# Altium PCB PCB_STM32.PcbDoc (part 1 of 2)
Units mm, origin at the board's own origin, x right, y up, seen from the top; angles counter-clockwise.
Board outline 65.5 x 38.75 mm, 2 copper layers (Top Layer, Bottom Layer), stack 1.569 mm thick; 43 components, 32 nets, 212 pads, 42 vias.
Unrouted connection lines stored in the file: 9.
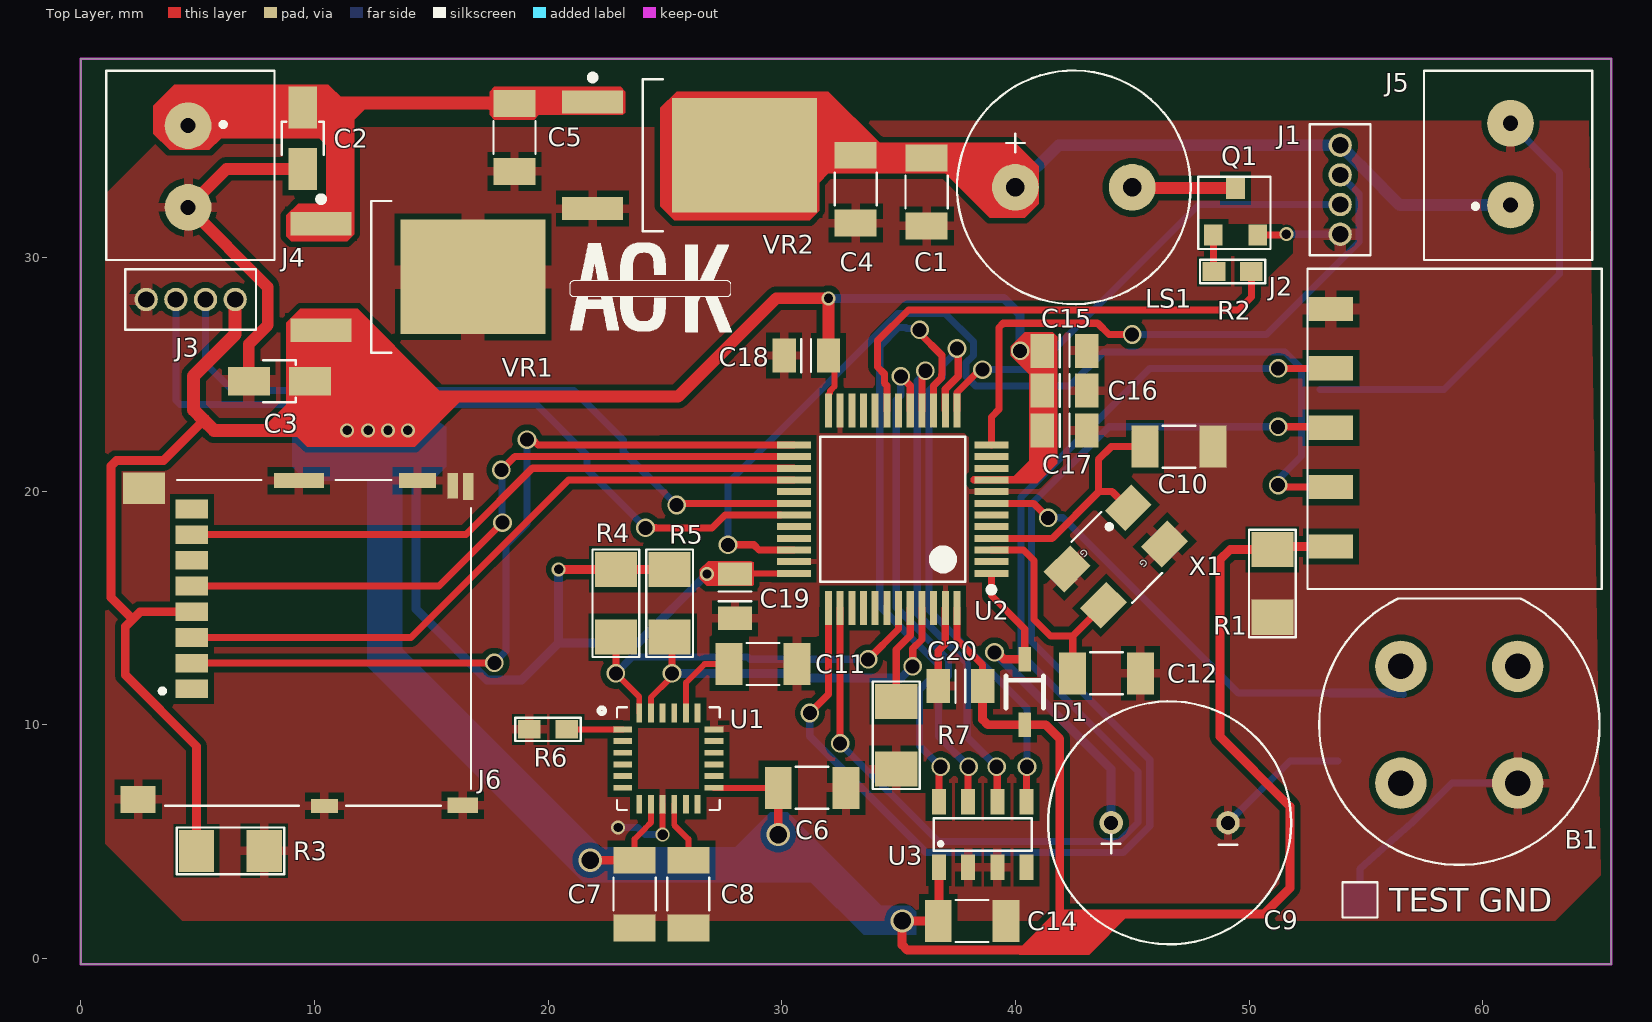
[diagram p0: Top Layer view]
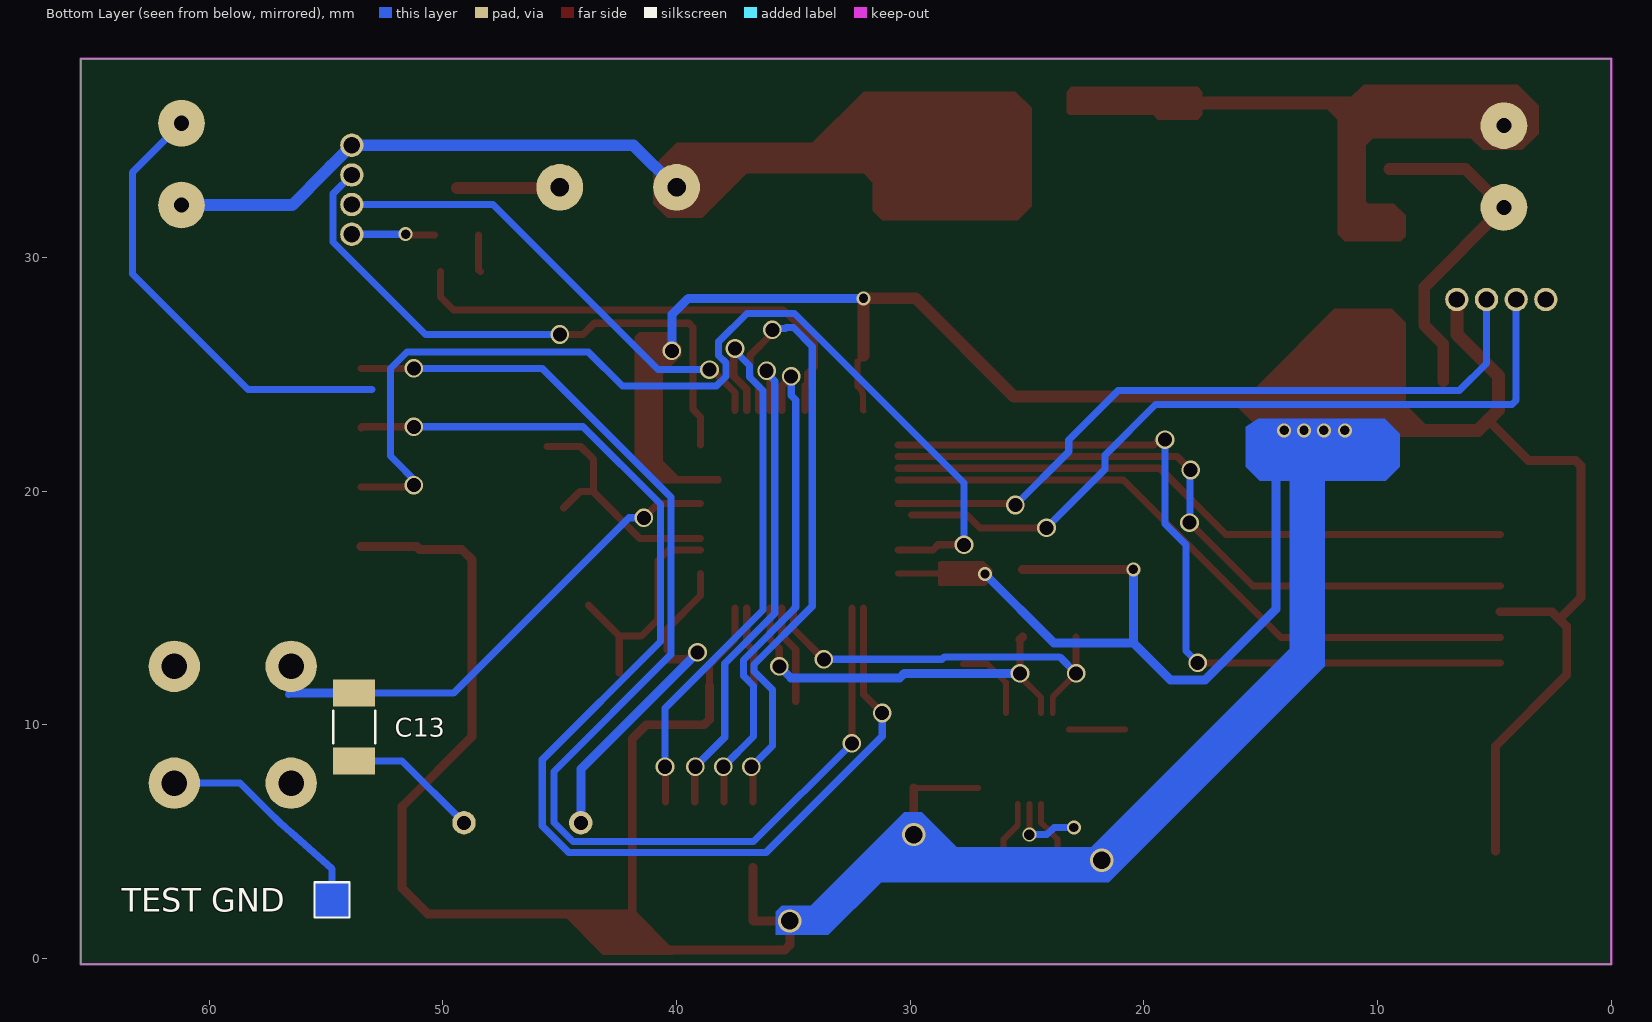
[diagram p1: Bottom Layer view, seen from below]
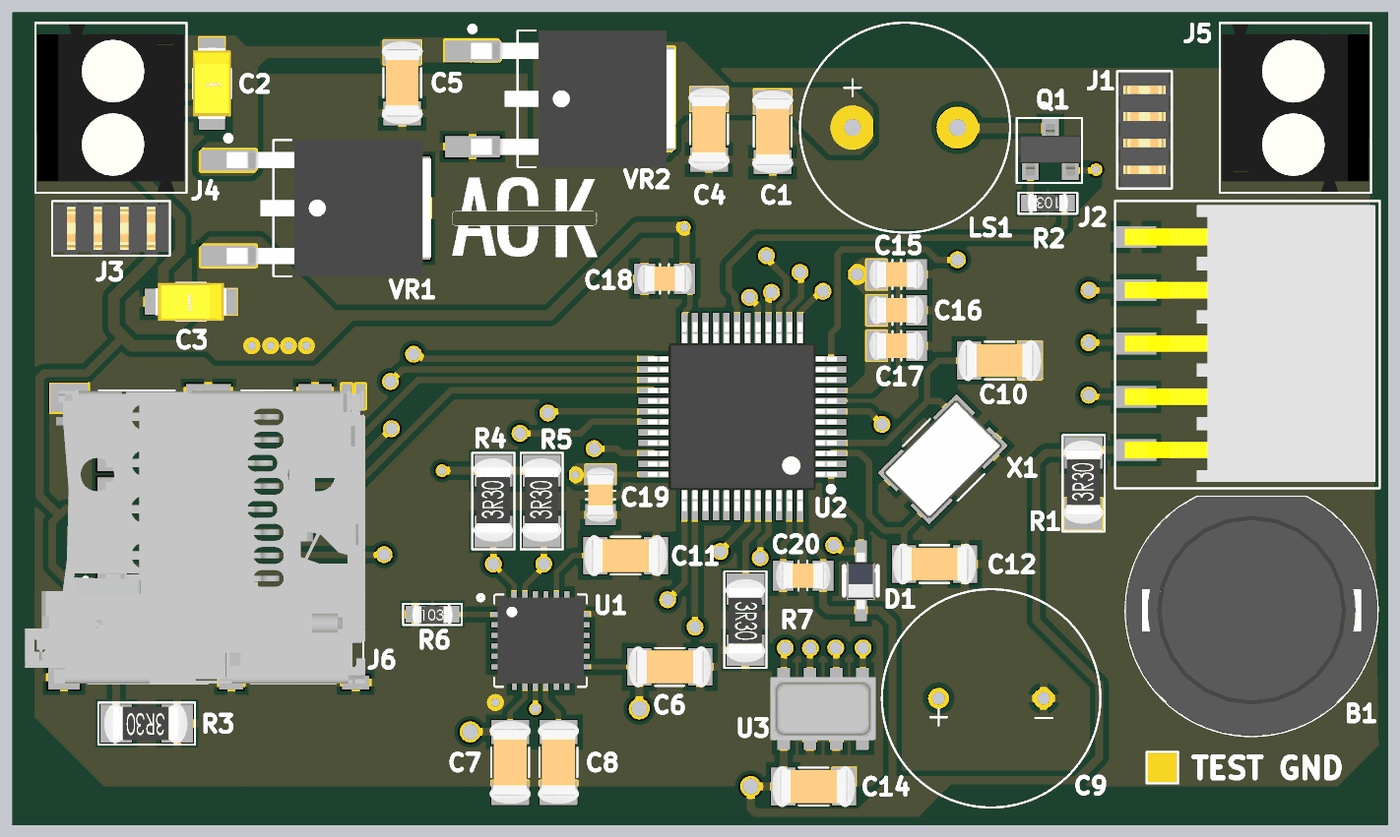
[diagram p2: 3D render of the assembled board from above, using the file's embedded part models]

## Layer stack, top to bottom
Top Solder: solder mask 0.0254, SM-001, Dk 4
Top Layer: signal copper 0.035
Dielectric 1: core 1.4986, Core-043, Dk 4.3
Bottom Layer: signal copper 0.035
Bottom Solder: solder mask 0.0254, SM-001, Dk 4

## Board outline
0,-0.25 65.5,-0.25 65.5,38.5 0,38.5

## Design rules (kind name [scope] priority, off if disabled: settings)
Clearance [All] p1: gap=0.152 ignorepadtopadclearanceinfootprint=FALSE except(0: Arc-Text Track-Text SMDPad-Text THPad-Text Via-Text Fill-Text Poly-Text Region-Text Text-Text; 0.254: THPad-THPad)
Creepage [All] p1: checkdistance=0.254 applytopolygonpour=TRUE
PlaneConnect [All] p1: planeconnectstyle=Relief reliefexpansion=0.508 reliefentries=4 reliefconductorwidth=0.381 reliefairgap=0.254
PolygonConnect [All] p1: connectstyle=Relief reliefconductorwidth=0.381 reliefentries=4 polygonreliefangle="90 Angle" airgapwidth=0.254
RoutingVias [All] p1: holewidth=0.6 width=0.8 viastyle="Through Hole" minholewidth=0.4 minwidth=0.5 maxholewidth=1 maxwidth=1.2
SMDEntry [All] p1: side=TRUE corner=TRUE anyangle=FALSE
SMDToCorner [All] p1: distance=60000
SMDToPlane [All] p1: distance=4724409
SolderMaskExpansion [All] p1: expansion=0.102 istentingtop=FALSE
UnRoutedNet [All] p1: checkbadconnections=TRUE
Width [All] p1: maxlimit=0.559 minlimit=0.203 preferedwidth=0.305
28 further rules are at their usual default settings.

## Classes and differential pairs
component class STM32: C1 C2 C3 C4 C5 J1 J2 J3 J4 J5 J6 LS1 Q1 R1 R2 R3 VR1 VR2
component class MCUs_STM32: B1 C6 C7 C8 C9 C10 C11 C12 C13 C14 C15 C16 C17 C18 C19 C20 D1 R4 R5 R6 R7 U1 U2 U3 X1

## Components (designator, comment, footprint, x,y, rotation, side; value= is the part's Value field where it differs from the comment)
B1 "B_D6R90 F1 LFS" PBUTTON_OFFMOM 59,10 r0 top
C1 "C1206C104K3RAC7800" CAP_1206 36.2,32.8 r90 top value=0.1uF
C2 "T494A106M020AT" CAP_1206_TANT 9.5,35.1 r270 top value=10uF
C3 "T494A106M020AT" CAP_1206_TANT 8.5,24.7 r180 top value=10uF
C4 "C1206C104K3RAC7800" CAP_1206 33.166,32.921 r270 top value=0.1uF
C5 "C1206C104K3RAC7800" CAP_1206 18.561,35.133 r270 top value=330nF
C6 "C1206C104K3RAC7800" CAP_1206 31.3,7.3 r180 top value=0.1uF
C7 "C1206C104K3RAC7800" CAP_1206 23.7,2.75 r90 top value=0.1uF
C8 "C1206C104K3RAC7800" CAP_1206 26,2.75 r270 top value=0.1uF
C9 "ESH477M050AH4AA" CAP_RADIAL_D10_P5 46.6,5.8 r0 top value=470uF
C10 "C1206C120J5GAC7800" CAP_1206 47,21.9 r0 top value=12pF
C11 "CC1206KRX7R9BB222" CAP_1206 29.2,12.6 r0 top value="2.2 nF"
C12 "C1206C120J5GAC7800" CAP_1206 43.9,12.2 r0 top value=12pF
C13 "C1206C104K3RAC7800" CAP_1206 53.8,9.9 r270 bottom value=0.1uF
C14 "C1206C104K3RAC7800" CAP_1206 38.15,1.6 r0 top value=0.1uF
C15 "CL21A475KAQNNNE" CAP_0805 42.1,26 r0 top value=4.7uF
C16 "CL21B105KBFNNNE" CAP_0805 42.1,24.3 r0 top value=1uF
C17 "CL21B104KBCNNNC" CAP_0805 42.1,22.6 r0 top
C18 "CL21B104KBCNNNC" CAP_0805 31.05,25.8 r180 top
C19 "CL21B104KBCNNNC" CAP_0805 28,15.5 r270 top
C20 "CL21B104KBCNNNC" CAP_0805 37.65,11.65 r180 top
D1 "1N4148WS" SOD_323_F 40.4,11.4 r270 top
J1 "RS1-04-G" PINHEADER_1X4_TH 53.9,32.895 r270 top
J2 "SMH-105-02-L-S" PINHEADER1X5_RA 53.5,22.71 r90 top
J3 "RS1-04-G" PINHEADER_1X4_TH 4.7,28.2 r180 top
J4 "0393570002" 2P_FEMALE_3.5MM_CONN 4.591,33.891 r270 top
J5 "0393570002" 2P_FEMALE_3.5MM_CONN 61.19,33.991 r90 top
J6 "2201778-1" MICRO_SD 9.5,13.5 r270 top
LS1 "CMI-9605-0580T" CMI-9605 42.5,33 r90 top
Q1 "MMBT3904-7-F" SOT_23_3 49.422,31.958 r0 top
R1 "RC1206FR-074K7L" RE_1206 51,16.05 r90 top value=4.7kR
R2 "RC0603JR-07100RL" RE_0603 49.3,29.4 r180 top value=100R
R3 "RC1206FR-074K7L" RE_1206 6.4,4.6 r180 top value=4.7kR
R4 "RC1206FR-074K7L" RE_1206 22.9,15.2 r90 top value=4.7kR
R5 "RC1206FR-074K7L" RE_1206 25.2,15.2 r90 top value=4.7kR
R6 "RC0603JR-070RL" RE_0603 20,9.8 r0 top value=0mR
R7 "RC1206FR-0710KL" RE_1206 34.9,9.55 r270 top value=10kR
U1 "MPU6050" QFN_24 25.15,8.55 r0 top
U2 "STM32F103C8T6" LQGP48-STM 34.75,19.225 r180 top
U3 "MS560702BA03-50" 8-SMD_MS560702BA03 38.6,5.3 r90 top
VR1 "LD1117V33" DPAK_TO-252-3 14.433,29.164 r0 top
VR2 "L7805CDT-TR" DPAK_TO-252-3 26.054,34.371 r0 top
X1 "ECS-80-10-30B-CKM-TR" "4-SMD, No Lead" 44.3,17.2 r225 top value="8 MHz" (schematic designator XTAL1)

## Footprints (in the part's own frame and the unit in brackets; to place one, negate y for a bottom-side part, rotate by r counter-clockwise, add the part's x,y. Pads: shape width x height; smd on the part's side, far side on the other; paste and mask are expansions set on the pad)
2P_FEMALE_3.5MM_CONN [mm]
  round 2 hole 0.65: 1(-1.75,0) 2(1.75,0)
  silkscreen extent -4.1,-3.5 4,3.7, body extent -4.05,-3.4 3.94,3.6, height 8.9
"4-SMD, No Lead" [mm]
  rect 1.6x1.25 smd mask+0.05: 1(-1.85,-1.1) 2(1.85,-1.1) 3(1.85,1.1) 4(-1.85,1.1)
  silkscreen extent -0.91,-1.79 0.9,1.9, body extent -2.5,-1.6 2.5,1.6, height 0.85
8-SMD_MS560702BA03 [mm] "TSQFP, 48-Leads, Body 7,00x7,00mm, Pitch 0,50mm, IPC Medium Density"
  rect 1.1x0.6 smd mask+0.05: 1(-1.4,1.875) 2(-1.4,0.625) 3(-1.4,-0.625) 4(-1.4,-1.875) 5(1.4,-1.875) 6(1.4,-0.625) 7(1.4,0.625) 8(1.4,1.875)
  silkscreen extent -0.7,-2.1 0.7,2.1, body extent -1.5,-2.5 1.5,2.5, height 0.98
CAP_0805 [mm]
  rect 1x1.45 smd mask+0.05: 1(-0.95,0) 2(0.95,0)
  silkscreen extent -0.2,-0.7 0.22,0.71, body extent -1.3,-0.68 1.3,0.68, height 0.9
CAP_1206 [mm]
  rect 1.15x1.8 smd mask+0.05: 1(-1.45,0) 2(1.45,0)
  silkscreen extent -0.7,-0.9 0.7,0.9, body extent -1.97,-0.98 1.97,0.98, height 1.3
CAP_1206_TANT [mm]
  rect 1.8x1.23 smd mask+0.05: 1(-1.31,0) 2(1.31,0)
  silkscreen extent -0.7,-0.9 0.7,0.9, body extent -1.7,-0.9 1.7,0.9, height 1.81
CAP_RADIAL_D10_P5 [mm]
  round 1 hole 0.6 mask+0.05: 1(-2.5,0) 2(2.5,0)
  silkscreen extent -5.2,-5.2 5.2,5.2, body extent -5.05,-5.03 4.95,4.97, height 20.2
CMI-9605 [mm]
  round 2 hole 0.8 mask+0.05: 1(0,2.5) 2(0,-2.5)
  silkscreen extent -5,-5 5,5, body extent -4.82,-4.81 4.78,6.2, height 5.16
DPAK_TO-252-3 [mm] "D-PAK, 3-Pads, Body 6,15x6,61mm (max), IPC Medium Density"
  rect 2.6x1 smd: 1(-4.15,2.28) 3(-4.15,-2.28)
  rect 6.2x4.9 smd: 2(2.35,0)
  silkscreen extent -4.27,-3.25 -1.15,3.45, body extent -4.22,-3.25 5.5,3.25, height 3.3
LQGP48-STM [mm] "TSQFP, 48-Leads, Body 7,00x7,00mm, Pitch 0,50mm, IPC Medium Density"
  rect 1.45x0.3 smd mask+0.055: 1(-4.225,2.75) 2(-4.225,2.25) 3(-4.225,1.75) 4(-4.225,1.25) 5(-4.225,0.75) 6(-4.225,0.25) 7(-4.225,-0.25) 8(-4.225,-0.75) 9(-4.225,-1.25) 10(-4.225,-1.75) 11(-4.225,-2.25) 12(-4.225,-2.75) 25(4.225,-2.75) 26(4.225,-2.25) 27(4.225,-1.75) 28(4.225,-1.25) 29(4.225,-0.75) 30(4.225,-0.25) 31(4.225,0.25) 32(4.225,0.75) 33(4.225,1.25) 34(4.225,1.75) 35(4.225,2.25) 36(4.225,2.75)
  rect 0.3x1.45 smd mask+0.055: 13(-2.75,-4.225) 14(-2.25,-4.225) 15(-1.75,-4.225) 16(-1.25,-4.225) 17(-0.75,-4.225) 18(-0.25,-4.225) 19(0.25,-4.225) 20(0.75,-4.225) 21(1.25,-4.225) 22(1.75,-4.225) 23(2.25,-4.225) 24(2.75,-4.225) 37(2.75,4.225) 38(2.25,4.225) 39(1.75,4.225) 40(1.25,4.225) 41(0.75,4.225) 42(0.25,4.225) 43(-0.25,4.225) 44(-0.75,4.225) 45(-1.25,4.225) 46(-1.75,4.225) 47(-2.25,4.225) 48(-2.75,4.225)
  silkscreen extent -4.35,-3.1 3.1,3.57, body extent -4.5,-4.5 4.5,4.5, height 1.6
MICRO_SD [mm]
  rect 0.8x1.4 smd: 1(1.965,-4.75) 2(0.865,-4.75) 3(-0.235,-4.75) 4(-1.335,-4.75) 5(-2.435,-4.75) 6(-3.535,-4.75) 7(-4.635,-4.75) 8(-5.735,-4.75)
  rect 1.15x0.45 smd: 9(-6.7,7.075)
  rect 1.1x0.45 smd: 10(-6.725,6.415)
  rect 1.35x1.8 smd: 11(-6.625,-6.8)
  rect 0.65x2.14 smd: 12(-6.95,-0.17)
  rect 0.65x1.6 smd: 13(-6.95,4.91)
  rect 0.65x1.3 smd: 14(6.95,6.85)
  rect 0.6x1.15 smd: 15(6.975,0.925)
  rect 1.16x1.5 smd: 16(6.695,-7.05)
  silkscreen extent -6.98,-6.11 6.98,7.2, body extent -7.03,-8.9 7,7.3, height 1.8
PBUTTON_OFFMOM [mm]
  round 2.2 hole 1.1: 1(-2.5,2.5) 2(-2.5,-2.5) 3(2.5,-2.5) 4(2.5,2.5)
  silkscreen extent -6,-6 6,5.4, body extent -6,-6 6,5.4, height 14.3
PINHEADER1X5_RA [mm]
  rect 1.04x1.91 smd mask+0: 1(-5.08,0) 2(-2.54,0) 3(0,0) 4(2.54,0) 5(5.08,0)
  silkscreen extent -6.9,-11.6 6.8,1, body extent -6.6,-11.4 6.6,0.54, height 2.21
PINHEADER_1X4_TH [mm]
  round 1 hole 0.7 mask+0.05: 1(-1.905,0) 2(-0.635,0) 3(0.63,0) 4(1.905,0)
  silkscreen extent -2.8,-1.3 2.8,1.3, body extent -2.74,-1.24 2.74,1.24, height 4.6
QFN_24 [mm] "PQFN, 24-Leads, Body 4,00x4,00mm, Pitch 0,50mm, Thermal Pad 4,00x2,70mm, IPC Medium Density"
  rect 0x0.35 smd: 1(-2.075,1.25) 2(-2.075,0.75) 3(-2.075,0.25) 4(-2.075,-0.25) 5(-2.075,-0.75) 6(-2.075,-1.25) 13(2.075,-1.25) 14(2.075,-0.75) 15(2.075,-0.25) 16(2.075,0.25) 17(2.075,0.75) 18(2.075,1.25)
  rect 0.8x0.25 smd mask+0.05: 1(-1.95,1.25) 2(-1.95,0.75) 3(-1.95,0.25) 4(-1.95,-0.25) 5(-1.95,-0.75) 6(-1.95,-1.25) 13(1.95,-1.25) 14(1.95,-0.75) 15(1.95,-0.25) 16(1.95,0.25) 17(1.95,0.75) 18(1.95,1.25)
  rect 0.35x0 smd: 7(-1.25,-2.075) 8(-0.75,-2.075) 9(-0.25,-2.075) 10(0.25,-2.075) 11(0.75,-2.075) 12(1.25,-2.075) 19(1.25,2.075) 20(0.75,2.075) 21(0.25,2.075) 22(-0.25,2.075) 23(-0.75,2.075) 24(-1.25,2.075)
  rect 0.25x0.8 smd mask+0.05: 7(-1.25,-1.95) 8(-0.75,-1.95) 9(-0.25,-1.95) 10(0.25,-1.95) 11(0.75,-1.95) 12(1.25,-1.95) 19(1.25,1.95) 20(0.75,1.95) 21(0.25,1.95) 22(-0.25,1.95) 23(-0.75,1.95) 24(-1.25,1.95)
  silkscreen extent -2.97,-2.2 2.2,2.2, body extent -2.05,-2.05 2.05,2.05, height 0.9
RE_0603 [mm]
  rect 0.965x0.8 smd mask+0.05: 1(-0.8,0) 2(0.8,0)
  silkscreen extent -1.4,-0.5 1.4,0.5, body extent -0.99,-0.5 0.99,0.48, height 0.45
RE_1206 [mm]
  rect 1.5x1.8 smd mask+0.05: 1(-1.45,0) 2(1.45,0)
  silkscreen extent -2.3,-1 2.3,1, body extent -1.93,-0.94 2.03,0.94, height 0.55
SOD_323_F [mm]
  rect 1.05x0.55 smd mask+0.05: 1(-1.4,0) 2(1.4,0)
  silkscreen extent -0.7,-0.8 0.7,0.8, body extent -1.35,-0.68 1.35,0.67, height 0.79
SOT_23_3 [mm]
  rect 0.8x0.9 smd mask+0.05: 1(-0.95,-1) 2(0,1) 3(0.95,-1)
  silkscreen extent -1.6,-1.6 1.5,1.5, body extent -1.46,-1.25 1.46,1.23, height 0.95

## Part data
C1 C4 C6 C7 C8 C13 C14: library part "CAP CER 0.1uF 1206", "Multilayer Ceramic Capacitor, 0.1 uF, 25 V, ± 10%, X7R, 1206 [3216 Metric]", Case Code (Metric)=3216, Case Code (Imperial)=1206, Dielectric=X7R, Dielectric Material=Ceramic, Manufacturer=KEMET, Manufacturer Part Number=C1206C104K3RACTU, Max Operating Temperature=125°C, Min Operating Temperature=-55°C, Package Quantity=4000, Supplier Part Number=399-C1206C104K3RAC7800CT-ND, Tolerance=10%, Voltage Rating=25V, Case/Package=1206, Category="Ceramic Capacitors", ComponentLink1Description=https://datasheet.ciiva.com/5416/kem-c1002-x7r-smd-5416282.pdf?src-supplier=Mouser, ComponentLink1URL=https://datasheet.ciiva.com/5416/kem-c1002-x7r-smd-5416282.pdf?src-supplier=Mouser, Construction=Flat, Depth=1.6mm, Designed By="Ahmet Can", Dissipation Factor=3.5%, Height=0.78mm, Length=3.2mm, Material=4241ConductorMaterial, Mounting Technology="Surface Mount", Packaging="Cut Tape", Pricing="1=0,1, 10=0,072, 50=0,0408, 100=0,0338, 500=0,02372, 1000=0,01963 (USD)", Reach SVHC Compliant=No, RoHS=Yes, RoHS Compliant=Yes, Series=C, Stock=306395, Supplier=Digi-Key, Termination=SMD/SMT, Thickness=0.035inch, Voltage Rating (DC)=25V, Width=0.063inch
C2 C3: library part "CAP TAN 10uF 2306", "Cap Tant Solid 10uF 20V A CASE 20% (3.2 X 1.6 X 1.6mm) SMD 3216-18 3 Ohm 125 C T/R", Manufacturer=KEMET, Supplier Part Number=399-5157-1-ND, Category="Tantalum Capacitors", ComponentLink1Description=https://datasheet.ciiva.com/22691/1778347-22691442.pdf?src-supplier=Element14, ComponentLink1URL=https://datasheet.ciiva.com/22691/1778347-22691442.pdf?src-supplier=Element14, ComponentLink2Description=https://datasheet.ciiva.com/258/kem-t2008-t494-258774.pdf?src-supplier=Digi-Key, ComponentLink2URL=https://datasheet.ciiva.com/258/kem-t2008-t494-258774.pdf?src-supplier=Digi-Key, ComponentLink3Description=https://datasheet.ciiva.com/258/kem-t2008-t494-258775.pdf?src-supplier=Digi-Key, ComponentLink3URL=https://datasheet.ciiva.com/258/kem-t2008-t494-258775.pdf?src-supplier=Digi-Key, ComponentLink4Description=https://datasheet.ciiva.com/258/kem-t2008-t494-258776.pdf?src-supplier=Digi-Key, ComponentLink4URL=https://datasheet.ciiva.com/258/kem-t2008-t494-258776.pdf?src-supplier=Digi-Key, Manufacturer Part Number=T494A106M020AT, Pricing="1=0,78, 10=0,596, 50=0,495, 100=0,4262, 500=0,32996, 1000=0,28414 (USD)", RoHS=Yes, Stock=64164, Supplier=Digi-Key
C5: library part "CAP CER 330nF 1206", "Cap Ceramic 0.33uF 16V X7R 10% SMD 1206 125°C Plastic T/R", Case/Package=1206, Dielectric=X7R, Dielectric Material=Ceramic, Manufacturer=KEMET, Manufacturer Part Number=C1206C334K4RAC7800, Max Operating Temperature=125°C, Min Operating Temperature=-55°C, Supplier Part Number=399-C1206C334K4RAC7800CT-ND, Tolerance=10%, Voltage Rating (DC)=16V, Category="Ceramic Capacitors", ComponentLink1Description=http://www.kemet.com/kemet/web/homepage/kechome.nsf/weben/C4DA2DA1D1C9D3C3CA2570A50016092D/$file/KEM_C1002_X7R_SMD.pdf, ComponentLink1URL=http://www.kemet.com/kemet/web/homepage/kechome.nsf/weben/C4DA2DA1D1C9D3C3CA2570A50016092D/$file/KEM_C1002_X7R_SMD.pdf, Construction=Flat, Depth=1.6mm, Designed By="Ahmet Can", Height=0.78mm, Length=3.2mm, Mounting Technology="Surface Mount", Packaging="Tape and Reel", Pricing="1=0,21, 10=0,144, 50=0,096, 100=0,0816, 500=0,0576, 1000=0,0504 (USD)", Radiation Hardening=No, RoHS=Yes, RoHS Compliant=Yes, Stock=6810, Supplier=Digi-Key
C9: library part "CAP ALU ELEC 470uF", "Cap, 470UF, 50V, Alu Elec, Radial, Through Hole", Case/Package="TH, Radial, Can", Lifetime @ Temp.="2000 Hrs @ 105°C", Manufacturer=KEMET, Max Operating Temperature=105°C, Min Operating Temperature=-40°C, Ripple Current @ High Frequency="945 mA @ 10 kHz", Ripple Current @ Low Frequency="630 mA @ 120 Hz", Supplier Part Number=399-15683-ND, Tolerance=±20%, Voltage Rating=50V, Category="Aluminum Electrolytic Capacitors", ComponentLink1Description=https://api.kemet.com/component-edge/download/datasheet/ESH477M050AH4AA.pdf?src-supplier=Digi-Key, ComponentLink1URL=https://api.kemet.com/component-edge/download/datasheet/ESH477M050AH4AA.pdf?src-supplier=Digi-Key, ComponentLink2Description=https://datasheet.octopart.com/ESH477M050AH4AA-KEMET-datasheet-130075338.pdf?src-supplier=Newark, ComponentLink2URL=https://datasheet.octopart.com/ESH477M050AH4AA-KEMET-datasheet-130075338.pdf?src-supplier=Newark, Designed By="Ahmet Can", Manufacturer Part Number=ESH477M050AH4AA, Mounting Type="Through Hole", Polarization=Polar, Pricing="1=0,64, 10=0,455, 50=0,344, 100=0,2997, 500=0,222, 1000=0,1887, 2500=0,1776, 5000=0,1665 (USD)", RoHS=Yes, Stock=6383, Supplier=Digi-Key
C10 C12: library part "CAP CER 12pF 1206", "Multilayer Ceramic Capacitor, 12 pF, 50 V, ± 5%, C0G (NP0), 1206 [3216 Metric]", Case Code (Metric)=3216, Case Code (Imperial)=1206, Dielectric=C0G, Dielectric Material=Ceramic, Manufacturer=KEMET, Manufacturer Part Number=C1206C120J5GACTU, Max Operating Temperature=125°C, Min Operating Temperature=-55°C, Supplier Part Number=399-C1206C120J5GAC7800CT-ND, Temperature Coefficient=30ppm/°C, Tolerance=5%, Voltage=50V, Case/Package=1206, Category="Ceramic Capacitors", ComponentLink1Description=https://datasheet.ciiva.com/7730/1732697-7730097.pdf?src-supplier=Element14, ComponentLink1URL=https://datasheet.ciiva.com/7730/1732697-7730097.pdf?src-supplier=Element14, ComponentLink2Description=https://datasheet.ciiva.com/145/docfinderpartnumber-c1206c120j5gactu-145627.pdf?src-supplier=Digi-Key, ComponentLink2URL=https://datasheet.ciiva.com/145/docfinderpartnumber-c1206c120j5gactu-145627.pdf?src-supplier=Digi-Key, ComponentLink3Description=https://datasheet.ciiva.com/14595/70095383-14595525.pdf?src-supplier=Allied+Electronics, ComponentLink3URL=https://datasheet.ciiva.com/14595/70095383-14595525.pdf?src-supplier=Allied+Electronics, ComponentLink4Description=https://datasheet.ciiva.com/14604/70095383-14604488.pdf?src-supplier=Allied+Electronics, ComponentLink4URL=https://datasheet.ciiva.com/14604/70095383-14604488.pdf?src-supplier=Allied+Electronics, Construction=Flat, Depth=1.6mm, Designed By="Ahmet Can", Dissipation Factor=0.1%, Height=0.78mm, Lead Free="Lead Free", Length=3.2mm, Material=4241ConductorMaterial, Mounting Technology="Surface Mount,PCB", Packaging="Tape and Reel", Pricing="1=0,2, 10=0,14, 50=0,0838, 100=0,0708, 500=0,04842, 1000=0,04284 (USD)", Reach SVHC Compliant=No, RoHS=Yes, RoHS Compliant=Yes, Series="SMD Comm C0G", Stock=15852, Supplier=Digi-Key, Termination=SMD/SMT, Voltage Rating=50V, Voltage Rating (DC)=50V, Weight=0.000571oz, Width=1.6mm
C11: library part "CAP CER 2.2 nF 1206", "CAP CER 2200PF 50V X7R 1206", Manufacturer=Yageo, Supplier Part Number=311-1171-1-ND, Category="Ceramic Capacitors", ComponentLink1Description=https://datasheet.ciiva.com/29148/445097-da-01-en-kerko-chip-1206-x7r-2200pf-10proz-50vg-29148910.pdf?src-supplier=Conrad, ComponentLink1URL=https://datasheet.ciiva.com/29148/445097-da-01-en-kerko-chip-1206-x7r-2200pf-10proz-50vg-29148910.pdf?src-supplier=Conrad, ComponentLink2Description=https://datasheet.ciiva.com/26829/getdatasheetpartid-137961-26829676.pdf?src-supplier=Verical, ComponentLink2URL=https://datasheet.ciiva.com/26829/getdatasheetpartid-137961-26829676.pdf?src-supplier=Verical, ComponentLink3Description=https://datasheet.ciiva.com/145/mlccorderingcode-145128.pdf?src-supplier=Digi-Key, ComponentLink3URL=https://datasheet.ciiva.com/145/mlccorderingcode-145128.pdf?src-supplier=Digi-Key, ComponentLink4Description=https://datasheet.ciiva.com/145/mlccorderingcode-145129.pdf?src-supplier=Digi-Key, ComponentLink4URL=https://datasheet.ciiva.com/145/mlccorderingcode-145129.pdf?src-supplier=Digi-Key, ComponentLink5Description=https://datasheet.ciiva.com/145/mlccorderingcode-145130.pdf?src-supplier=Digi-Key, ComponentLink5URL=https://datasheet.ciiva.com/145/mlccorderingcode-145130.pdf?src-supplier=Digi-Key, ComponentLink6Description=https://datasheet.ciiva.com/11466/upy-gphc-x7r-6-3v-to-50v-8-11466764.pdf?src-supplier=Avnet, ComponentLink6URL=https://datasheet.ciiva.com/11466/upy-gphc-x7r-6-3v-to-50v-8-11466764.pdf?src-supplier=Avnet, Manufacturer Part Number=CC1206KRX7R9BB222, Pricing="1=0,21, 10=0,145, 50=0,087, 100=0,0735, 500=0,05026, 1000=0,04446 (USD)", RoHS=Yes, Stock=22858, Supplier=Digi-Key
C15: library part "CAP CER 4.7uF 0805", "Multilayer Ceramic Capacitor, 4.7 uF, 25 V, ± 10%, X5R, 0805 [2012 Metric]", Case Code (Metric)=2012, Case Code (Imperial)=0805, Dielectric=X5R, Manufacturer=Samsung, Max Operating Temperature=85°C, Min Operating Temperature=-55°C, Supplier Part Number=1276-1244-1-ND, Tolerance=10%, Voltage Rating=25V, Case/Package=0805, Category="Ceramic Capacitors", ComponentLink1Description=https://datasheet.ciiva.com/25798/cl21a475kaqnnne-25798882.pdf?src-supplier=Digi-Key, ComponentLink1URL=https://datasheet.ciiva.com/25798/cl21a475kaqnnne-25798882.pdf?src-supplier=Digi-Key, Construction=Flat, Depth=1.25mm, Designed By="Ahmet Can", Height=1.25mm, Lead Free="Lead Free", Length=2mm, Manufacturer Part Number=CL21A475KAQNNNE, Material=4241ConductorMaterial, Mounting Technology="Surface Mount", Packaging="Tape and Reel", Pricing="1=0,1, 10=0,073, 50=0,0414, 100=0,0344, 500=0,02408, 1000=0,01994 (USD)", Radiation Hardening=No, RoHS=Yes, RoHS Compliant=Yes, Series=CL, Stock=3906800, Supplier=Digi-Key, Voltage Rating (DC)=25V
C16: library part "CAP CER 1uF 0805", "CAP CER %10 1uF 0805", Case Code (Metric)=2012, Case Code (Imperial)=0805, Dielectric=X7R, Manufacturer=Samsung, Max Operating Temperature=125°C, Min Operating Temperature=-55°C, Package Quantity=1, Supplier Part Number=1276-1029-1-ND, Tolerance=10%, Voltage=50V, Case/Package=0805, Category="Ceramic Capacitors", ComponentLink1Description=https://datasheet.ciiva.com/25800/cl21b105kbfnnne-25800291.pdf?src-supplier=Digi-Key, ComponentLink1URL=https://datasheet.ciiva.com/25800/cl21b105kbfnnne-25800291.pdf?src-supplier=Digi-Key, ComponentLink2Description=https://datasheet.ciiva.com/16449/cl21b105kbfnnne-16449003.pdf?src-supplier=Future+Electronics, ComponentLink2URL=https://datasheet.ciiva.com/16449/cl21b105kbfnnne-16449003.pdf?src-supplier=Future+Electronics, Construction=Flat, Depth=1.25mm, Height=1.25mm, Length=2mm, Manufacturer Part Number=CL21B105KBFNNNE, Material=4241ConductorMaterial, Mounting Technology="Surface Mount", Packaging="Tape and Reel", Pricing="1=0,11, 10=0,079, 50=0,045, 100=0,0373, 500=0,02616, 1000=0,02165 (USD)", Radiation Hardening=No, RoHS=Yes, RoHS Compliant=Yes, Series=CL, Stock=212507, Supplier=Digi-Key, Thickness=0.053inch, Voltage Rating=50V, Voltage Rating (DC)=50V, Width=0.049inch
C17 C18 C19 C20: library part "CAP CER 100nF 0805", "Multilayer Ceramic Capacitor, 0.1 uF, 50 V, ± 10%, X7R, 0805 [2012 Metric]", Capacitance=100nF, Case Code (Metric)=2012, Case Code (Imperial)=0805, Dielectric=X7R, Manufacturer=Samsung, Max Operating Temperature=125°C, Min Operating Temperature=-55°C, Supplier Part Number=1276-1003-1-ND, Tolerance=10%, Voltage=50V, Case/Package=0805, Category="Ceramic Capacitors", ComponentLink1Description=https://datasheet.ciiva.com/25710/cl21b104kbcnnnc-25710182.pdf?src-supplier=Digi-Key, ComponentLink1URL=https://datasheet.ciiva.com/25710/cl21b104kbcnnnc-25710182.pdf?src-supplier=Digi-Key, ComponentLink2Description=https://datasheet.ciiva.com/29199/454152-da-01-en-vs-kondensator-0805-29199814.pdf?src-supplier=Conrad, ComponentLink2URL=https://datasheet.ciiva.com/29199/454152-da-01-en-vs-kondensator-0805-29199814.pdf?src-supplier=Conrad, Construction=Flat, Depth=1.25mm, Height=0.85mm, Lead Free="Lead Free", Length=2mm, Manufacturer Part Number=CL21B104KBCNNNC, Material=Ceramic, Mounting Technology="Surface Mount", Packaging="Tape and Reel", Pricing="1=0,1, 10=0,044, 50=0,024, 100=0,0196, 500=0,01404, 1000=0,01103 (USD)", Radiation Hardening=No, RoHS=Yes, RoHS Compliant=Yes, Series=CL, Stock=1461740, Supplier=Digi-Key, Thickness=0.037inch, Voltage Rating=50V, Voltage Rating (DC)=50V, Width=0.049inch
D1: library part DIO_1N4148WS, "Diode Ultra Fast Recovery Rectifier 75V 0.15A 2-Pin SOD-323F T/R", Average Rectified Current=150mA, Manufacturer="ON Semiconductor / Fairchild", Max Forward Surge Current (Ifsm)=2A, Max Operating Temperature=150°C, Max Repetitive Reverse Voltage (Vrrm)=75V, Max Reverse Current=5uA, Min Operating Temperature=-55°C, Package Quantity=1, Supplier Part Number=1N4148WSFSCT-ND, Category="Rectifier Diodes", ComponentLink1Description=https://datasheet.ciiva.com/15208/getdatasheetpartid-127819-15208358.pdf?src-supplier=Verical, ComponentLink1URL=https://datasheet.ciiva.com/15208/getdatasheetpartid-127819-15208358.pdf?src-supplier=Verical, ComponentLink2Description=https://datasheet.ciiva.com/8300/1n914bws-8300360.pdf?src-supplier=Avnet, ComponentLink2URL=https://datasheet.ciiva.com/8300/1n914bws-8300360.pdf?src-supplier=Avnet, ComponentLink3Description=https://datasheet.ciiva.com/910/1n4148ws-910381.pdf?src-supplier=Digi-Key, ComponentLink3URL=https://datasheet.ciiva.com/910/1n4148ws-910381.pdf?src-supplier=Digi-Key, ComponentLink4Description=https://datasheet.ciiva.com/910/1n4148ws-910382.pdf?src-supplier=Digi-Key, ComponentLink4URL=https://datasheet.ciiva.com/910/1n4148ws-910382.pdf?src-supplier=Digi-Key, Designed By="Ahmet Can", Element Configuration=Single, Forward Current=150mA, Height=1mm, Lead Free="Lead Free", Length=1.8mm, Manufacturer Part Number=1N4148WS, Max Reverse Voltage (DC)=75V, Mounting Technology="Surface Mount", Packaging="Tape and Reel", Pins=2, Pricing="1=0,17, 10=0,159, 100=0,0867, 500=0,05332, 1000=0,03636 (USD)", Radiation Hardening=No, Reach SVHC Compliant=No, Recovery Time=4ns, Reverse Recovery Time=4ns, Reverse Voltage=75V, RoHS=Yes, RoHS Compliant=Yes, Series=-, Stock=1299120, Supplier=Digi-Key, Weight=0.0276g, Width=1.35mm
J1 J3: library part J_RS1-04-G, "4 Position Receptacle Connector 0.100\" (2.54mm) Through Hole Gold", Manufacturer="Adam Equipment", Supplier Part Number=2057-RS1-04-G-ND, Category="Headers and Wire Housings", ComponentLink1Description=https://datasheet.ciiva.com/19462/2169758-19462353.pdf?src-supplier=Jameco, ComponentLink1URL=https://datasheet.ciiva.com/19462/2169758-19462353.pdf?src-supplier=Jameco, Manufacturer Part Number=RS1-04-G, Pricing="1=0,31, 10=0,267, 80=0,20788, 800=0,15695, 1600=0,14084, 5600=0,12726, 10400=0,11878 (USD)", RoHS=No, Stock=4500, Supplier=Digi-Key
J2: library part J_SMH-105-02-L-S, "5 Position Receptacle Connector 0.100\" (2.54mm) Surface Mount, Right Angle Gold", Flammability Rating="UL94 V-0", Manufacturer=Samtec, Max Operating Temperature=125°C, Min Operating Temperature=-55°C, Supplier Part Number=SAM11813-ND, Insulation Color=Black, Category=Connectors, ComponentLink1Description=http://www.farnell.com/datasheets/1927708.pdf?_ga=2.237598468.569325269.1503285096-1413671594.1503025027&src-supplier=Farnell, ComponentLink1URL=http://www.farnell.com/datasheets/1927708.pdf?_ga=2.237598468.569325269.1503285096-1413671594.1503025027&src-supplier=Farnell, ComponentLink2Description=http://www.samtec.com/documents/webfiles/pdf/SMH.PDF?src-supplier=Newark, ComponentLink2URL=http://www.samtec.com/documents/webfiles/pdf/SMH.PDF?src-supplier=Newark, ComponentLink3Description=http://www.samtec.com/documents/webfiles/pdf/SMH.PDF?src-supplier=Avnet, ComponentLink3URL=http://www.samtec.com/documents/webfiles/pdf/SMH.PDF?src-supplier=Avnet, ComponentLink4Description=http://suddendocs.samtec.com/catalog_english/smh.pdf?src-supplier=Digi-Key, ComponentLink4URL=http://suddendocs.samtec.com/catalog_english/smh.pdf?src-supplier=Digi-Key, Connector Type=Receptacle, Contact Finish - Mating=GOLD, Contact Material=Bronze, Contact Plating=Gold, Contact Shape=Square, Contact Type=Forked, Designed By="Ahmet Can", Fastening Type=Pull, Gender=Receptacle, Manufacturer Part Number=SMH-105-02-L-S, Number of Contacts=5, Number of Positions=5, Number of Rows=1, Orientation=Horizontal, Packaging=Rail/Tube, Pitch=2.54mm, Pricing="1=2,18, 10=1,899, 100=1,6968, 500=1,414, 1000=1,212, 5000=1,07464 (USD)", Radiation Hardening=No, Reach SVHC Compliant=No, RoHS=Yes, RoHS Compliant=Yes, Series=SMH, Stock=47, Supplier=Digi-Key, Termination=Solder, Insulation Material=Polymer
J4 J5: library part J_2P_FML_3.5MM, "3.50mm Pitch Beau Eurostyle Fixed Mount PCB Terminal Block, 2 Circuits", Manufacturer=Molex, Supplier Part Number=WM7877-ND, ComponentLink1Description=https://datasheet.ciiva.com/6751/393590004-sd-6751377.pdf?src-supplier=Digi-Key, ComponentLink1URL=https://datasheet.ciiva.com/6751/393590004-sd-6751377.pdf?src-supplier=Digi-Key, Manufacturer Part Number=0393570002, Pricing="1=1,04, 10=0,729, 25=0,6804, 50=0,6174, 100=0,6147, 250=0,51908, 500=0,49176, 1000=0,43713, 5000=0,35517 (USD)", RoHS=Yes, Stock=107955, Supplier=Digi-Key
J6: library part J_2201778-1, "Conn Memory Card RCP 8 POS 1.1mm Solder RA SMD 0.5A/Contact T/R", Color=Black, Contact Current Rating=500mA, Flammability Rating="UL94 V-0", Manufacturer="TE Connectivity", Max Operating Temperature=85°C, Min Operating Temperature=-30°C, Supplier Part Number=A118117CT-ND, Category="Memory Connectors", Circuit Application=Signal, ComponentLink1Description=https://datasheet.ciiva.com/23834/1737844-23834387.pdf?src-supplier=Newark, ComponentLink1URL=https://datasheet.ciiva.com/23834/1737844-23834387.pdf?src-supplier=Newark, ComponentLink2Description=https://datasheet.ciiva.com/22783/600547-22783409.pdf?src-supplier=Farnell, ComponentLink2URL=https://datasheet.ciiva.com/22783/600547-22783409.pdf?src-supplier=Farnell, ComponentLink3Description=https://datasheet.ciiva.com/22796/1651579-22796241.pdf?src-supplier=Farnell, ComponentLink3URL=https://datasheet.ciiva.com/22796/1651579-22796241.pdf?src-supplier=Farnell, ComponentLink4Description=https://datasheet.ciiva.com/29722/eng-cd-2201778-a-29722873.pdf?src-supplier=Digi-Key, ComponentLink4URL=https://datasheet.ciiva.com/29722/eng-cd-2201778-a-29722873.pdf?src-supplier=Digi-Key, ComponentLink5Description=https://datasheet.ciiva.com/22710/600547-22710877.pdf?src-supplier=Element14, ComponentLink5URL=https://datasheet.ciiva.com/22710/600547-22710877.pdf?src-supplier=Element14, ComponentLink6Description=https://datasheet.ciiva.com/22726/600547-22726299.pdf?src-supplier=Element14, ComponentLink6URL=https://datasheet.ciiva.com/22726/600547-22726299.pdf?src-supplier=Element14, ComponentLink7Description=https://datasheet.ciiva.com/29722/eng-cd-2201778-a-29722874.pdf?src-supplier=Digi-Key, ComponentLink7URL=https://datasheet.ciiva.com/29722/eng-cd-2201778-a-29722874.pdf?src-supplier=Digi-Key, Contact Material="Copper Alloy", Contact Plating=Gold, Designed By="Ahmet Can", ELV=Compliant, Housing Color=Black, Housing Material=Polymer, Lead Free="Lead Free", Manufacturer Part Number=2201778-1, Mounting Technology="Surface Mount", Number of Positions=8, Number of Rows=1, Packaging="Tape and Reel", Pitch=0.04inch, Pricing="1=2,81, 10=2,503, 25=2,49, 50=2,4646, 100=2,2614, 250=2,24864, 500=2,04538 (USD)", Reach SVHC Compliant=Unknown, RoHS=Yes, RoHS Compliant=Yes, Series=-, Shell Material="Copper Alloy", Shielding=Unshielded, Stock=6669, Supplier=Digi-Key, Termination=SMD/SMT, Underplate Material=Nickel
LS1: library part LS_CMI-9605-0580T, "9.6 mm, 5 Vdc, 80 dB, Through Hole, Driving Circuit, Magnetic Audio Indicator Buzzer", Case/Package=CMI-9605, Frequency=2.7kHz, Manufacturer=CUI, Max Operating Temperature=70°C, Max Supply Voltage=7V, Min Operating Temperature=-30°C, Min Supply Voltage=3V, Nominal Supply Voltage=5V, Supplier Part Number=102-CMI-9605-0580T-ND, Supply Current=30mA, Designed By="Ahmet Can", Manufacturer Part Number=CMI-9605-0580T, Mounting Technology="Through Hole", Packaging=Box, RoHS=No, SPL="80dB @ 5V, 10cm", Supplier=Digi-Key, Voltage Rating=5V
Q1: library part Q_MMBT3904-7-F, "Transistor General Purpose BJT NPN 40 Volt 0.2A Automotive 3-Pin SOT-23-3", Case/Package=SOT-23, Clock Frequency=300MHz, Collector Base Voltage (VCBO)=60V, Collector Emitter Breakdown Voltage=40V, Collector Emitter Saturation Voltage=300mV, Continuous Collector Current=200mA, Emitter Base Voltage (VEBO)=6V, Manufacturer="Diodes Zetex", Max Operating Temperature=150°C, Max Power Dissipation=300mW, Min Operating Temperature=-55°C, Package Quantity=3000, Power Dissipation=350mW, Supplier Part Number=MMBT3904-FDICT-ND, Category=BJTs, Collector Emitter Voltage (VCEO)=40V, Collector-emitter Voltage-Max=300mV, ComponentLink1Description=https://datasheet.ciiva.com/11201/ds30036-11201778.pdf?src-supplier=Avnet, ComponentLink1URL=https://datasheet.ciiva.com/11201/ds30036-11201778.pdf?src-supplier=Avnet, ComponentLink2Description=https://datasheet.ciiva.com/15138/getdatasheetpartid-53265-15138780.pdf?src-supplier=Verical, ComponentLink2URL=https://datasheet.ciiva.com/15138/getdatasheetpartid-53265-15138780.pdf?src-supplier=Verical, ComponentLink3Description=https://datasheet.ciiva.com/22711/1915516-22711750.pdf?src-supplier=Element14, ComponentLink3URL=https://datasheet.ciiva.com/22711/1915516-22711750.pdf?src-supplier=Element14, ComponentLink4Description=https://datasheet.ciiva.com/11198/ds30036-11198999.pdf?src-supplier=Avnet, ComponentLink4URL=https://datasheet.ciiva.com/11198/ds30036-11198999.pdf?src-supplier=Avnet, ComponentLink5Description=https://datasheet.ciiva.com/6361/ds30036-6361256.pdf?src-supplier=Digi-Key, ComponentLink5URL=https://datasheet.ciiva.com/6361/ds30036-6361256.pdf?src-supplier=Digi-Key, ComponentLink6Description=https://datasheet.ciiva.com/6361/ds30036-6361254.pdf?src-supplier=Digi-Key, ComponentLink6URL=https://datasheet.ciiva.com/6361/ds30036-6361254.pdf?src-supplier=Digi-Key, Designed By="Ahmet Can", Frequency=300MHz, Gain Bandwidth Product=300MHz, Height=1mm, hFE Min=100, Lead Free="Lead Free", Length=3.05mm, Manufacturer Part Number=MMBT3904-7-F, Max Breakdown Voltage=40V, Max Collector Current=200mA, Mounting Technology="Surface Mount", Number of Elements=1, Packaging="Tape and Reel", Pins=3, Polarity=NPN, Pricing="1=0,12, 10=0,111, 100=0,0607, 500=0,03732, 1000=0,02545 (USD)", Radiation Hardening=No, Reach SVHC Compliant=No, RoHS=Yes, RoHS Compliant=Yes, Series="Automotive, AEC-Q101", Stock=5948624, Supplier=Digi-Key, Transition Frequency=300MHz, Voltage Rating (DC)=40V, Weight=0.000282oz, Width=1.4mm
R1 R3 R4 R5: library part "RES 4K7 1206", "SMD Chip Resistor, 4.7 kOhm, ± 1%, 250 mW, 1206 [3216 Metric], Thick Film, General Purpose", Case Code (Metric)=3216, Case Code (Imperial)=1206, Manufacturer=Yageo, Max Operating Temperature=155°C, Min Operating Temperature=-55°C, Power Rating=250mW, Resistance Tolerance=1%, Resistor Type="Thick Film", Supplier Part Number=311-4.70KFRCT-ND, Temperature Coefficient=100ppm/°C, Voltage Rating=200V, Case/Package=1206, Category="Chip SMD Resistors", Designed By="Ahmet Can", Lead Free="Lead Free", Manufacturer Part Number=RC1206FR-074K7L, Packaging="Tape and Reel", Pins=2, Pricing="1=0,1, 10=0,036, 50=0,0232, 100=0,0195, 500=0,01364, 1000=0,01187 (USD)", Reach SVHC Compliant=Unknown, RoHS=Yes, RoHS Compliant=Yes, Series=RC02H, Stock=2180352, Supplier=Digi-Key, Tolerance=1%, Voltage Rating (DC)=200V, Width=1.6mm
R2: library part "RES 100 0603", "Res Thick Film 0603 100 Ohm 5% 1/10W ±100ppm/°C Molded SMD SMD Paper T/R", Case Code (Metric)=1608, Case Code (Imperial)=0603, Manufacturer=Yageo, Max Operating Temperature=155°C, Max Power Dissipation=100mW, Min Operating Temperature=-55°C, Resistance Tolerance=5%, Resistor Type="Thick Film", Supplier Part Number=311-100GRCT-ND, Temperature Coefficient=100ppm/°C, Voltage Rating=50V, Case/Package=0603, Category="Chip SMD Resistors", ComponentLink1Description=https://datasheet.ciiva.com/7746/443971-7746425.pdf?src-supplier=Element14, ComponentLink1URL=https://datasheet.ciiva.com/7746/443971-7746425.pdf?src-supplier=Element14, ComponentLink2Description=https://datasheet.ciiva.com/7746/443971-7746426.pdf?src-supplier=Element14, ComponentLink2URL=https://datasheet.ciiva.com/7746/443971-7746426.pdf?src-supplier=Element14, ComponentLink3Description=https://datasheet.ciiva.com/8883/pyu-rc0603-51-rohs-l-4-8883047.pdf?src-supplier=Avnet, ComponentLink3URL=https://datasheet.ciiva.com/8883/pyu-rc0603-51-rohs-l-4-8883047.pdf?src-supplier=Avnet, ComponentLink4Description=https://datasheet.ciiva.com/15189/getdatasheetpartid-325207-15189846.pdf?src-supplier=Verical, ComponentLink4URL=https://datasheet.ciiva.com/15189/getdatasheetpartid-325207-15189846.pdf?src-supplier=Verical, Construction=Rectangular, Contact Plating=Tin,Matte, Depth=0.8mm, Designed By="Ahmet Can", Features="Moisture Resistant", Lead Free="Lead Free", Length=1.6mm, Manufacturer Part Number=RC0603JR-07100RL, Military Standard=Not, Number of Terminations=2, Packaging="Tape and Reel", Pins=2, Power Rating=100mW, Pricing="1=0,1, 10=0,014, 50=0,0088, 100=0,0073, 500=0,00486, 1000=0,00415 (USD)", Reach SVHC Compliant=Unknown, RoHS=Yes, RoHS Compliant=Yes, Series=RC, Stock=909469, Supplier=Digi-Key, Termination=SMD/SMT, Tolerance=5%, Voltage Rating (DC)=50V, Width=0.8mm
R6: library part "RES 0K 0603", "Zero Ohm Resistor, Jumper, 0603 [1608 Metric], Thick Film, 100 mW, 1 A, Surface Mount", Case Code (Metric)=1608, Case Code (Imperial)=0603, Manufacturer=Yageo, Max Operating Temperature=155°C, Max Power Dissipation=100mW, Min Operating Temperature=-55°C, Package Quantity=5000, Resistance Tolerance=5%, Resistor Type="Thick Film", Supplier Part Number=311-0.0GRCT-ND, Temperature Coefficient=200ppm/°C, Tolerance=1%, Voltage Rating=50V, Case/Package=0603, Category="Chip SMD Resistors", Construction=Rectangular, Contact Plating=Tin,Matte, Depth=0.8mm, Designed By="Ahmet Can", Features="Moisture Resistant", Height=0.45mm, Lead Free="Lead Free", Length=1.6mm, Manufacturer Part Number=RC0603JR-070RL, Military Standard=Not, Number of Terminations=2, Packaging="Tape and Reel", Pins=2, Power Rating=100mW, Pricing="1=0,1, 10=0,016, 25=0,0112, 50=0,0086, 100=0,0063, 250=0,0048, 500=0,00386, 1000=0,00284 (USD)", Reach SVHC Compliant=Unknown, RoHS=Yes, RoHS Compliant=Yes, Series=RC, Stock=5815021, Supplier=Digi-Key, Technology="THICK FILM", Termination=SMD/SMT, Voltage Rating (DC)=50V, Width=0.8mm
R7: library part "RES 10K 1206", "SMD Chip Resistor, 10 kOhm, ± 1%, 250 mW, 1206 [3216 Metric], Thick Film, General Purpose", Case Code (Metric)=3216, Case Code (Imperial)=1206, Manufacturer=Yageo, Max Operating Temperature=155°C, Max Power Dissipation=250mW, Min Operating Temperature=-55°C, Package Quantity=5000, Resistance Tolerance=1%, Resistor Type="Thick Film", Supplier Part Number=311-10.0KFRCT-ND, Temperature Coefficient=100ppm/°C, Voltage Rating=200V, Case/Package=1206, Category="Chip SMD Resistors", ComponentLink1Description=https://datasheet.ciiva.com/46445/444357-46445703.pdf?src-supplier=Element14, ComponentLink1URL=https://datasheet.ciiva.com/46445/444357-46445703.pdf?src-supplier=Element14, ComponentLink2Description=https://datasheet.ciiva.com/7857/1692832-7857244.pdf?src-supplier=Element14, ComponentLink2URL=https://datasheet.ciiva.com/7857/1692832-7857244.pdf?src-supplier=Element14, ComponentLink3Description=https://datasheet.ciiva.com/7857/1692832-7857245.pdf?src-supplier=Element14, ComponentLink3URL=https://datasheet.ciiva.com/7857/1692832-7857245.pdf?src-supplier=Element14, Designed By="Ahmet Can", Features="Moisture Resistant", Height=0.55mm, Lead Free="Lead Free", Length=3.1mm, Manufacturer Part Number=RC1206FR-0710KL, Number of Terminations=2, Packaging="Tape and Reel", Power Rating=250mW, Pricing="1=0,1, 10=0,036, 50=0,0232, 100=0,0195, 500=0,01364, 1000=0,01187 (USD)", Reach SVHC Compliant=Unknown, RoHS=Yes, RoHS Compliant=Yes, Series=RC, Stock=3977916, Supplier=Digi-Key, Termination=SMD/SMT, Tolerance=1%, Voltage Rating (AC)=200V, Width=1.6mm
U1: library part U_MPU6050, "IMU ACCEL/GYRO 3-AXIS I2C 24QFN", Manufacturer="TDK InvenSense", Manufacturer Part Number=MPU-6050, Max Operating Temperature=85°C, Min Operating Temperature=-40°C, Supplier Part Number=1428-1007-1-ND, Category="Inertial Measurement Units (IMUs)", ComponentLink1Description=https://datasheet.ciiva.com/1513/1788002-1513632.pdf?src-supplier=Element14, ComponentLink1URL=https://datasheet.ciiva.com/1513/1788002-1513632.pdf?src-supplier=Element14, ComponentLink2Description=https://datasheet.ciiva.com/22731/1788002-22731434.pdf?src-supplier=Element14, ComponentLink2URL=https://datasheet.ciiva.com/22731/1788002-22731434.pdf?src-supplier=Element14, Designed By="Ahmet Can", Output Type=I²C, Pricing="1=8,71, 10=6,969, 25=6,4464, 100=5,5752, 500=5,22676, 1000=4,8783 (USD)", RoHS=Yes, Sensor Type="Accelerometer, Gyroscope, 6 Axis", Stock=40546, Supplier=Digi-Key
U2: library part U_STM32F103C8T6, "ARM Cortex-M3 STM32 F1 Microcontroller 32-Bit 72MHz 64kB FLASH LQFP48 STM32F103C8T6", Case/Package=LQFP, Clock Frequency=72MHz, Manufacturer=STMicroelectronics, Max Operating Temperature=85°C, Max Supply Voltage=3.6V, Min Operating Temperature=-40°C, Min Supply Voltage=2V, Nominal Supply Current=1.7uA, Package Quantity=1500, Supplier Part Number=497-6063-ND, Category=Microcontrollers, ComponentLink1Description=https://datasheet.ciiva.com/8054/1730126-8054942.pdf?src-supplier=Element14, ComponentLink1URL=https://datasheet.ciiva.com/8054/1730126-8054942.pdf?src-supplier=Element14, ComponentLink2Description=https://datasheet.ciiva.com/48687/001075658-da-01-en-mcu-64kb-mem-stm32f103c8t6-lqfp-48-stm-48687589.pdf?src-supplier=Conrad, ComponentLink2URL=https://datasheet.ciiva.com/48687/001075658-da-01-en-mcu-64kb-mem-stm32f103c8t6-lqfp-48-stm-48687589.pdf?src-supplier=Conrad, Core Architecture=ARM, Data Bus Width=32b, Designed By="Ahmet Can", Height=1.4mm, Lead Free="Lead Free", Length=7mm, Manufacturer Part Number=STM32F103C8T6, Memory Format=FLASH, Memory Size=64KB, Number of A/D Converters=2NUMBER, Number of ADC Channels=10, Number of Channels=10NUMBER, Number of Timers/Counters=3, Number of I/Os=37, Packaging=Tray, Pins=48, Pricing="1=6,42, 25=5,5256, 100=4,7979, 500=4,17798, 2500=3,5672 (USD)", RAM Size=20KB, RoHS=Yes, RoHS Compliant=Yes, Series=STM32F103C8, Stock=3317, Supplier=Digi-Key, Weight=0.006349oz, Width=7mm, Interface=I2C,SPI,USB,CAN,USART
U3: library part U_MS560702BA03-50, "Board Mount Pressure Sensor 0.01bar to 1.2bar Absolute 8-Pin QFN T/R", Manufacturer="TE Connectivity", Operating Pressure="0.15PSI ~ 17.4PSI (1kPa ~ 120kPa)", Supplier Part Number=223-1198-1-ND, Supply Voltage="1.8V ~ 3.6V", Category="Pressure Sensors", ComponentLink1Description=http://www.farnell.com/datasheets/1756127.pdf?src-supplier=Farnell, ComponentLink1URL=http://www.farnell.com/datasheets/1756127.pdf?src-supplier=Farnell, ComponentLink2Description=https://datasheet.octopart.com/MS560702BA03-50-TE-Connectivity-datasheet-21074431.pdf?src-supplier=Element14, ComponentLink2URL=https://datasheet.octopart.com/MS560702BA03-50-TE-Connectivity-datasheet-21074431.pdf?src-supplier=Element14, ComponentLink3Description=https://www.te.com/commerce/DocumentDelivery/DDEController?Action=srchrtrv&DocNm=MS5607-02BA03&DocType=Data+Sheet&DocLang=English&src-supplier=Digi-Key, ComponentLink3URL=https://www.te.com/commerce/DocumentDelivery/DDEController?Action=srchrtrv&DocNm=MS5607-02BA03&DocType=Data+Sheet&DocLang=English&src-supplier=Digi-Key, ComponentLink4Description=https://datasheet.octopart.com/MS560702BA03-50-TE-Connectivity-datasheet-15137560.pdf?src-supplier=Future+Electronics, ComponentLink4URL=https://datasheet.octopart.com/MS560702BA03-50-TE-Connectivity-datasheet-15137560.pdf?src-supplier=Future+Electronics, ComponentLink5Description=https://datasheet.octopart.com/MS560702BA03-50-TE-Connectivity-datasheet-65793091.pdf?src-supplier=Sager+Electronics, ComponentLink5URL=https://datasheet.octopart.com/MS560702BA03-50-TE-Connectivity-datasheet-65793091.pdf?src-supplier=Sager+Electronics, ComponentLink6Description=https://datasheet.octopart.com/MS560702BA03-50-TE-Connectivity-datasheet-93687046.pdf?src-supplier=Master+Electronics, ComponentLink6URL=https://datasheet.octopart.com/MS560702BA03-50-TE-Connectivity-datasheet-93687046.pdf?src-supplier=Master+Electronics, Designed By="Ahmet Can", Manufacturer Part Number=MS560702BA03-50, Output Type="I²C, SPI", Pricing="1=10,86, 10=8,686, 25=8,0344, 100=6,9488, 500=6,5145, 1000=6,0802 (USD)", RoHS=Yes, Stock=66297, Supplier=Digi-Key
VR1: library part VR_LD1086DT33TR, "LDO Regulator Pos 3.3V 1.3A 3-Pin(3+Tab) TO-220AB Tube", Case/Package=TO, Dropout Voltage=1.1V, Manufacturer=STMicroelectronics, Max Operating Temperature=125°C, Max Output current=1.3A, Max Power Dissipation=12W, Max Supply Voltage=15V, Min Operating Temperature=0°C, Min Output Voltage=3.3V, Output Voltage Accuracy=1%, Package Quantity=1000, Power Supply Rejection Ratio (PSRR)=75dB, Quiescent Current=10mA, Supplier Part Number=497-1491-5-ND, Supply Current=5mA, Accuracy=1%, Category="Voltage Regulators - Linear", ComponentLink1Description=https://datasheet.ciiva.com/27055/1991854-27055801.pdf?src-supplier=Jameco, ComponentLink1URL=https://datasheet.ciiva.com/27055/1991854-27055801.pdf?src-supplier=Jameco, ComponentLink2Description=https://datasheet.ciiva.com/15110/getdatasheetpartid-31296-15110899.pdf?src-supplier=Verical, ComponentLink2URL=https://datasheet.ciiva.com/15110/getdatasheetpartid-31296-15110899.pdf?src-supplier=Verical, ComponentLink3Description=https://datasheet.ciiva.com/2044/cd00000544-2044225.pdf?src-supplier=Digi-Key, ComponentLink3URL=https://datasheet.ciiva.com/2044/cd00000544-2044225.pdf?src-supplier=Digi-Key, ComponentLink4Description=https://datasheet.ciiva.com/1511/1776449-1511579.pdf?src-supplier=Element14, ComponentLink4URL=https://datasheet.ciiva.com/1511/1776449-1511579.pdf?src-supplier=Element14, ComponentLink5Description=https://datasheet.ciiva.com/16457/cd00000544-16457726.pdf?src-supplier=Future+Electronics, ComponentLink5URL=https://datasheet.ciiva.com/16457/cd00000544-16457726.pdf?src-supplier=Future+Electronics, Designed By="Ahmet Can", Height=9.15mm, Lead Free="Lead Free", Length=10.4mm, Manufacturer Part Number=LD1117V33, Mounting Technology="Through Hole", Nominal Output Voltage=3.3V, Number of Outputs=1, Number of Regulators=1, Output Configuration=Positive, Output Current=1.3A, Output Type=Fixed, Output Voltage=3.3V, Packaging=Rail/Tube, Pins=3, Polarity=Positive, Power Dissipation=12W, Pricing="1=0,83, 25=0,6952, 100=0,5566, 500=0,44002, 2500=0,3185, 10000=0,29008 (USD)", Radiation Hardening=No, Reach SVHC Compliant=No, RoHS=Yes, RoHS Compliant=Yes, Series=-, Stock=1467, Supplier=Digi-Key, Width=4.6mm, Input Bias Current=5mA
VR2: library part VR_L7805CDT-TR, "IC REG LDO 5V 1.5A DPAK", Manufacturer=STMicroelectronics, Supplier Part Number=497-7255-1-ND, Category="Voltage Regulators - Linear", ComponentLink1Description=https://datasheet.ciiva.com/2042/cd00000444-2042783.pdf?src-supplier=Digi-Key, ComponentLink1URL=https://datasheet.ciiva.com/2042/cd00000444-2042783.pdf?src-supplier=Digi-Key, ComponentLink2Description=https://datasheet.ciiva.com/2042/cd00000444-2042784.pdf?src-supplier=Digi-Key, ComponentLink2URL=https://datasheet.ciiva.com/2042/cd00000444-2042784.pdf?src-supplier=Digi-Key, ComponentLink3Description=https://datasheet.ciiva.com/2042/cd00000444-2042785.pdf?src-supplier=Digi-Key, ComponentLink3URL=https://datasheet.ciiva.com/2042/cd00000444-2042785.pdf?src-supplier=Digi-Key, ComponentLink4Description=https://datasheet.ciiva.com/16357/cd00000444-16357893.pdf?src-supplier=Future+Electronics, ComponentLink4URL=https://datasheet.ciiva.com/16357/cd00000444-16357893.pdf?src-supplier=Future+Electronics, ComponentLink5Description=https://datasheet.ciiva.com/4882/cd00000444-4882231.pdf?src-supplier=Mouser, ComponentLink5URL=https://datasheet.ciiva.com/4882/cd00000444-4882231.pdf?src-supplier=Mouser, Designed By="Ahmet Can", Manufacturer Part Number=L7805CDT-TR, Pricing="1=1,12, 10=1, 25=0,9488, 100=0,7795, 250=0,72868, 500=0,64396, 1000=0,50839 (USD)", RoHS=Yes, Stock=44558, Supplier=Digi-Key
X1: library part "XTAL_CRYSTAL_8 MHz", "8 MHz ±10ppm Crystal 10pF 100 Ohms 4-SMD, No Lead", Manufacturer="ECS International", Supplier Part Number=50-ECS-80-10-30B-CKM-CT-ND, Manufacturer Part Number=ECS-80-10-30B-CKM-TR, Pricing="1=0,66, 10=0,581, 50=0,5432, 100=0,48, 500=0,45474 (USD)", RoHS=No, Stock=25024, Supplier=Digi-Key

## Via types
v1: diameter 0.8, hole 0.6, Top Layer to Bottom Layer, 29 vias
v2: diameter 0.6, hole 0.4, Top Layer to Bottom Layer, 9 vias
v3: diameter 1, hole 0.75, Top Layer to Bottom Layer, 3 vias
v4: diameter 0.6, hole 0.45, Top Layer to Bottom Layer, 1 vias

## Nets (pads, with @x,y where several pads share a name; then routed paths per layer and width w, separated by ;. In a path a pad name is that pad's centre, name@x,y a point inside that pad or via, vN(x,y) a via of type N, cw(c..) or ccw(c..) an arc to the next point about the centre after c; other vN are vias at no path point)
3V3DC: C3.1 C6.2 C7.2 C14.1 C15.1 C16.1 C17.1 C18.1 C19.1 C20.1 D1.2 J2.1 J3.1 J6.4 R1.2 R3.2 R4.2 R5.2 U1.8 U1.13 U2.9 U2.24 U2.36 U2.48 U3.1 VR1.3 | length 206.5
  Top Layer w0.254: C7.2 23.7,5.1 24.171,5.571 24.171,5.581 24.4,5.811 U1.8@24.4,6.6 ; U1.13@27.1,7.3 27.652,7.3 C6.2 ; C19.1 28.025,16.475 U2.36 ; U2.24 32.023,23.473 32.023,24.149 32.071,24.197 32.071,24.291 32.26,24.48 32.26,25.54 C18.1
  Top Layer w0.305: U2.48 37.5,13.65 38.6,12.55 C20.1
  Top Layer w0.381: J6.4 2.535,14.835 2.217,14.517 ; R3.2 4.95,9.079 1.9,12.129 1.9,14.2 2.217,14.517 ; 5.266,23.034 3.531,21.3 1.523,21.3 1.3,21.077 1.3,15.435 2.217,14.517 ; v2(20.45,16.65) R4.2 R5.2 ; v3(21.8,4.2) C7.2 ; v3(29.85,5.3) C6.2 ; C14.1 v3(35.15,1.6) 35.15,0.573 35.373,0.35 40.35,0.35 41.9,1.9 ; C14.1@36.725,1.625 U3.1 ; C20.1 38.6,10.223 38.823,10 D1.2 41.3,10 41.9,9.4 41.9,1.9 ; J2.1 51.13,17.63 R1.2 49.196,17.5 48.75,17.054 48.75,9.5 51.75,6.5 51.75,3 50.65,1.9 41.9,1.9
  Top Layer w0.508: 14.86,24.045 25.56,24.045 29.765,28.25 v2(32,28.25) C18.1
  Top Layer w0.559: J3.1 6.605,26.705 4.831,24.931 4.831,23.469 5.266,23.034 5.7,22.6 10.1,22.6
  Bottom Layer w0.381: 14.35,20.65 14.35,14.949 17.392,11.907 18.857,11.907 20.45,13.5 ; v2(20.45,16.65) 20.45,13.5 ; v2(26.8,16.45) 23.85,13.5 20.45,13.5 ; v3(29.85,5.3) 33.55,1.6 v3(35.15,1.6) ; v2(32,28.25) 39.5,28.25 40.2,27.55 40.2,26.01 v1(40.205,26.005)
  Bottom Layer w0.457: v3(21.8,4.2) 28.75,4.2 v3(29.85,5.3)
  Bottom Layer w0.508: 13.5,20.827 13.5,12.5 v3(21.8,4.2)
  other v2: 11.4,22.6 12.3,22.6 13.15,22.6 14,22.6
5VDC: C1.2 C4.1 J1.1 J5.1 LS1.1 VR2.2 | length 23
  Bottom Layer w0.508: LS1.1@40.024,32.974 41.85,34.8 J1.1 54.264,34.436 54.275,34.436 54.806,33.905 ccw(c55.179,34.251) 54.807,33.904 54.971,33.729 ccw(c55.342,34.076) 54.972,33.728 ; 54.972,33.728 56.459,32.241 J5.1
7V4DC: C2.1 C5.1 J4.1 VR1.1 VR2.1 | length 8
  Top Layer w0.559: 10.6,36.6 17.492,36.6 17.509,36.583 C5.1
BOOT0: R7.1 U2.44 | length 4.2
  Top Layer w0.305: R7.1 34.9,13.218 35.5,13.818 U2.44
GND: B1.3 C1.1 C2.2 C3.2 C4.2 C5.2 C6.1 C7.1 C8.2 C9.2 C10.2 C11.2 C12.2 C13.2 C14.2 C15.2 C16.2 C17.2 C18.2 C19.2 C20.2 J1.4 J2.5 J3.4 J4.2 J5.2 J6.9 J6.10 J6.11 J6.12 J6.13 J6.14 J6.15 J6.16 Q1.3 R1.1 R3.1 R6.1 R7.2 U1.9 U1.18 U2.8 U2.23 U2.35 U2.47 U3.2 U3.3 VR1.2 VR2.3 X1.2 X1.4 | length 60.6
  Top Layer w0.254: v4(24.9,5.3) 24.9,6.048 U1.9@24.9,6.6
  Top Layer w0.305: C20.2 36.7,13.15 37,13.45 U2.47 ; Q1.3 51.558,30.958 v2(51.595,30.995)
  Top Layer w0.508: C3.2 7.19,26.29 8,27.1 8,28.732 J4.2 6.24,33.79 C2.2